# EAGLE board helicopter2 (EAGLE 5.06)
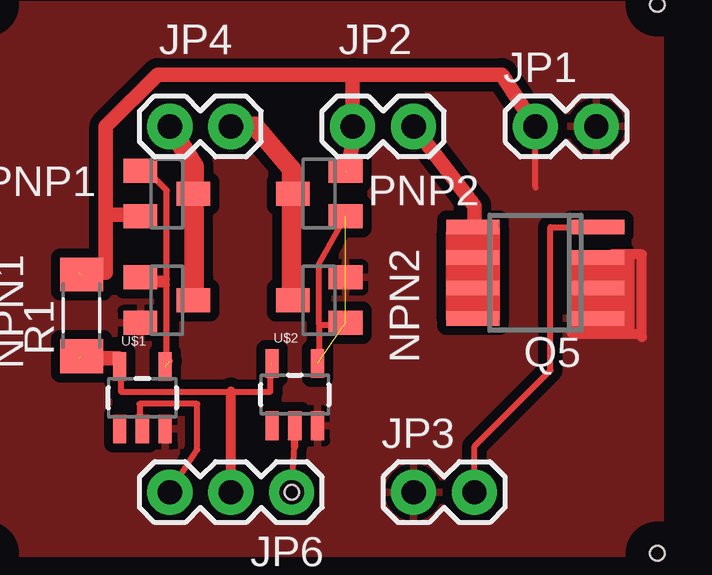
[diagram p0: board, top side]

No outline drawn. Coordinates in mm, seen from the top.
Copper layers (1*16): Top 0.035mm / dielectric 1.5mm / Bottom 0.035mm
Design rules "default *": minimum track width 10mil, minimum drill 24mil, track to track 15mil, track to pad 15mil, pad to pad 8mil, via to via 8mil, smd to smd 8mil, copper to edge 40mil, drill to drill 8mil, minimum pad ring 10mil, minimum via ring 8mil, stop-mask expansion 4mil, vias tented up to drill 0mil, thermal gap 10mil
Holes 0.6 mm at 12.7,2.54 0,0 0,22.86 27.94,22.86 27.94,0

## Footprints (pad centres in the part's own frame; a part is rotated, then mirrored left to right if it is on the bottom)
1X02 = drill 1.016 pad 1.88 round: 1 0,0; 2 2.54,0
1X03 = drill 1.016 pad 1.88 round: 1 0,0; 2 2.54,0; 3 5.08,0
SOT23 = smd 1 x 1.4: 1 -0.95,-1.1; 2 0.95,-1.1; 3 0,1.1
SO-08 = smd 0.6 x 2.2: 1 -1.905,-2.6; 2 -0.635,-2.6; 3 0.635,-2.6; 4 1.905,-2.6; 5 1.905,2.6; 6 0.635,2.6; 7 -0.635,2.6; 8 -1.905,2.6
M1406 = smd 1.4 x 1.8: 1 -1.7,0; 2 1.7,0
SOT23-5 = smd 0.55 x 1.2: 1 -0.95,-1.3; 2 0,-1.3; 3 0.95,-1.3; 4 0.95,1.3; 5 -0.95,1.3

## Placement (x,y rotation side)
JP1  [1X02]  22.86,17.78 0 top
JP2  [1X02]  17.78,17.78 180 top
JP3  [1X02]  17.78,2.54 0 top
JP4  [1X02]  10.16,17.78 180 top
JP6  [1X03]  12.7,2.54 180 top
NPN1  [SOT23]  7.49,10.54 270 top
NPN2  [SOT23]  13.84,10.54 90 top
PNP1  [SOT23]  7.49,14.99 270 top
PNP2  [SOT23]  13.84,14.99 90 top
Q5  [SO-08]  22.86,11.68 90 top
R1  [M1406]  3.94,9.91 90 top
U$1  INVERTER  [SOT23-5]  6.48,6.48 0 top
U$2  INVERTER  [SOT23-5]  12.83,6.6 0 top

## Library data of the parts
JP1-JP4 JP6 U$1 U$2 = SparkFun
NPN1 NPN2 PNP1 PNP2 = semicon-smd-ipc
Q5 = transistor-power
R1 = resistor

## Nets
+12V: JP1.1 JP2.2 PNP1.2 PNP2.2 R1.2
+12V_X: JP6.2 R1.1 U$1.5 U$2.5
A: JP6.1 U$2.2
GND: JP1.2 JP3.1 NPN1.2 NPN2.2 Q5.1 U$1.3 U$2.3
N$1: JP6.3 U$1.2
N$2: JP3.2 Q5.4
N$5: JP4.1 NPN2.3 PNP2.3
N$7: JP2.1 Q5.5
N$10: NPN1.1 PNP1.1 U$1.4
SSS: NPN2.1 PNP2.1 U$2.4
ZZZZZ: JP4.2 NPN1.3 PNP1.3

## Tracks (layer width: path | path; a pad name or v marks a point on that pad's centre or on a via)
+12V  (2 unrouted)
  Top 0.254: PNP1.2 6.35,13.97 6.35,14.1
  Top 0.61: 4.95,14.1 6.35,14.1 6.48,14.1 | 4.95,14.1 4.95,17.78 7.11,19.94 15.24,19.94 | 15.24,19.94 JP2.2 15.24,17.02 14.99,15.88 | 15.24,19.94 21.46,19.94 JP1.1 | 3.81,11.68 4.95,11.68 4.95,14.1
+12V_X  (3 unrouted)
  Top 0.254: 5.46,8.13 5.46,7.75 5.59,7.75 5.59,6.73 10.16,6.73 11.81,6.73 11.81,7.87
  Top 0.406: 10.16,6.73 JP6.2
  Top 0.61: 5.46,8.13 3.81,8.13
A
  Top 0.254: 12.83,5.33 U$2.2 | JP6.1 12.83,4.45
  Top 0.305: 12.83,4.45 12.83,5.33
GND
  Top 0.254: 6.22,9.78 6.86,9.91 NPN1.2 | 24.64,12.32 24.51,12.32 24.51,9.78 24.64,9.78 | 22.86,15.24 22.86,17.78
  Top 0.406: 25.27,12.19 26.8,12.19 26.8,9.4 24.38,9.4 24.38,9.14 27.18,9.14 27.3,9.02 27.3,12.45 26.04,12.45 25.91,12.32
  Top 0.61: 26.42,12.32 26.42,9.78 24.64,9.78 24.64,12.32 25.15,12.32 | 25.15,12.32 25.91,12.32 26.04,12.32 26.04,10.03 24.89,10.03 24.89,11.94 25.65,11.94 25.65,10.41 25.15,10.41 25.15,11.56 25.27,11.68 25.27,12.19 25.15,12.32
  pour Top: 0,22.86 0,0 28.07,0 28.07,22.86
N$1
  Top 0.254: JP6.3 8.76,4.32 8.76,6.22 6.35,6.22 6.35,5.08 U$1.2
N$2
  Top 0.254: 25.4,13.59 Q5.4 23.5,13.59 23.5,7.62 20.32,4.45 JP3.2
N$3
  Top 0.61: 21.08,13.46 21.08,9.78 19.43,9.78 19.43,13.34 19.56,13.46 20.45,13.46 20.7,13.21 20.7,10.16 19.94,10.16 19.94,13.08 20.19,13.08 20.32,13.21 20.32,10.41
N$5
  Top 0.254: 12.7,14.99 PNP2.3 | 12.7,10.54 12.57,10.16 NPN2.3
  Top 0.813: 12.83,10.54 12.7,10.54 12.7,14.99 12.7,16 11.18,17.78 JP4.1
N$7
  Top 0.61: Q5.5 20.32,13.59 | 20.32,13.59 20.83,13.59 | 20.32,13.59 20.32,14.48 JP2.1
N$10  (1 unrouted)
  Top 0.254: PNP1.1 6.99,15.62 7.49,15.11 7.49,11.43 | 7.49,11.18 7.49,11.43 | 7.49,11.43 6.35,11.43 | 7.49,11.18 6.86,11.18 NPN1.1 | 7.49,11.18 7.49,8.13 7.62,8
N$12
  Top 0.254: 13.84,9.53 13.84,8 | 13.84,9.53 13.84,12.06 14.99,14.1 | 13.84,9.53 14.99,9.53
SSS  (2 unrouted)
ZZZZZ
  Top 0.254: 8.13,14.99 PNP1.3 8.64,14.99 | NPN1.3 8.89,10.16 8.89,11.43 8.64,11.43
  Top 0.305: 8.64,10.54 NPN1.3 8.51,10.54
  Top 0.813: 8.64,14.99 8.76,14.99 | 8.64,14.99 8.64,16.13 JP4.2 | 8.64,10.54 8.64,11.43 8.64,14.99